# Altium PCB Exp 10.PcbDoc
Units mm, origin at the board's own origin, x right, y up, seen from the top; angles counter-clockwise.
Board outline 152.4 x 136.53 mm, 2 copper layers (Top Layer, Bottom Layer); 66 components, 92 nets, 213 pads, 0 vias.
Unrouted connection lines stored in the file: 6.
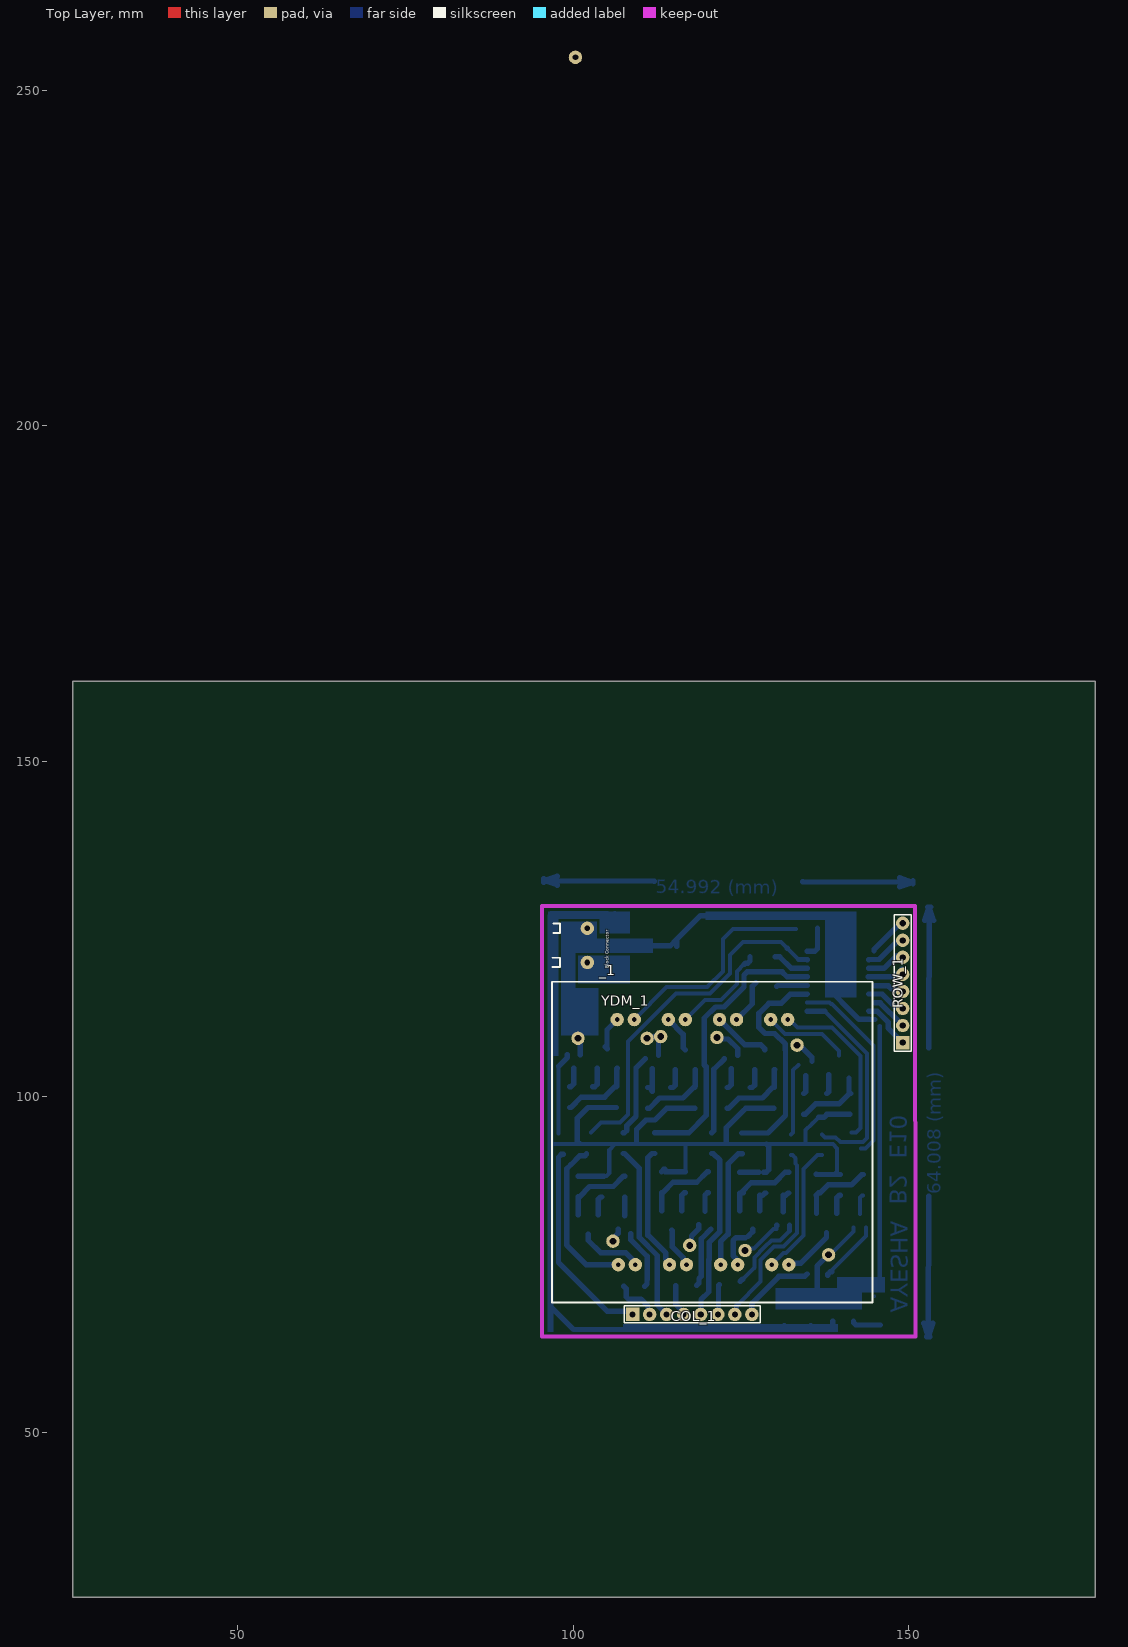
[diagram p0: Top Layer view]
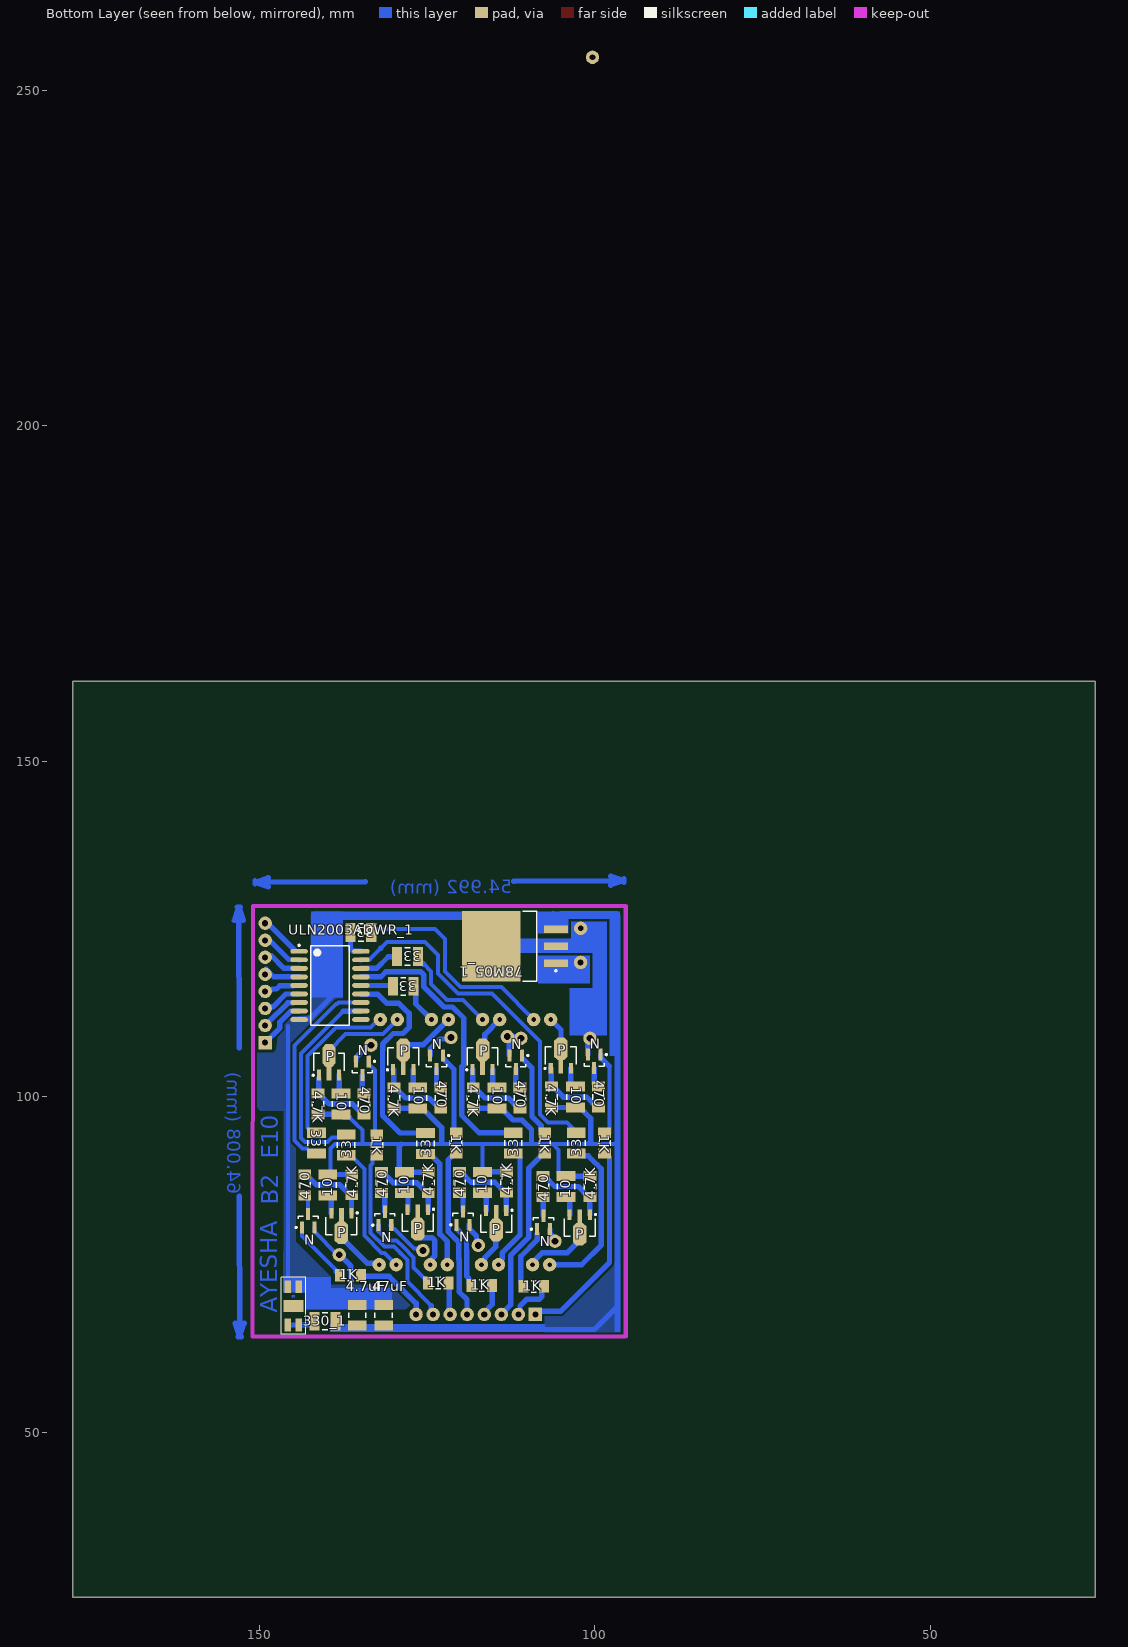
[diagram p1: Bottom Layer view, seen from below]

## Layer stack, top to bottom
Top Solder: solder mask 0.0102, Solder Resist, Dk 3.5
Top Layer: signal copper 0.0356
Dielectric 1: dielectric 0.32, FR-4, Dk 4.8
Bottom Layer: signal copper 0.0356
Bottom Solder: solder mask 0.0102, Solder Resist, Dk 3.5

## Board outline
25.4,25.4 177.8,25.4 177.8,161.925 25.4,161.925

## Design rules (kind name [scope] priority, off if disabled: settings)
Clearance [All] p1: gap=0.35 ignorepadtopadclearanceinfootprint=FALSE
PlaneClearance [All] p1: clearance=0.85
PolygonConnect [All] p1: connectstyle=Direct reliefconductorwidth=0.254 reliefentries=4 polygonreliefangle="90 Angle" airgapwidth=0.254
RoutingVias [All] p1: holewidth=0.711 width=1.27 viastyle="Through Hole" minholewidth=0.711 minwidth=1.27 maxholewidth=0.711 maxwidth=1.27
SolderMaskExpansion [All] p1: expansion=0.102 istentingtop=FALSE
Width [All] p1: maxlimit=0.8 minlimit=0.6 preferedwidth=0.6 minimp=50.000000 maximp=50.000000 favimp=50.000000
29 further rules are at their usual default settings.

## Components (designator, comment, footprint, x,y, rotation, side; value= is the part's Value field where it differs from the comment)
1K "Comment" RESC3216M 132.461,92.837 r270 bottom
1K "Comment" RESC3216M 98.552,93.091 r270 bottom
1K "Comment" RESC3216M 120.65,93.091 r270 bottom
1K "Comment" RESC3216M 107.442,93.091 r270 bottom
1K "Comment" RESC3216M 123.317,72.263 r180 bottom
1K "Comment" RESC3216M 116.84,71.882 r180 bottom
1K "Comment" RESC3216M 136.398,73.406 r180 bottom
1K "Comment" RESC3216M 109.093,71.755 r180 bottom
4.7K "Comment" RESC3216M 141.224,98.933 r270 bottom
4.7K "Comment" RESC3216M 106.426,99.949 r270 bottom
4.7K "Comment" RESC3216M 129.921,99.822 r270 bottom
4.7K "Comment" RESC3216M 118.11,99.822 r270 bottom
4.7K "Comment" RESC3216M 124.792,87.226 r90 bottom
4.7K "Comment" RESC3216M 113.157,87.275 r90 bottom
4.7K "Comment" RESC3216M 136.222,86.883 r90 bottom
4.7K "Comment" RESC3216M 100.711,86.64 r90 bottom
4.7uF "Comment" CAPC3225M 135.382,67.437 r90 bottom
10 "Comment" RESC3225M 137.795,98.933 r270 bottom
10 "Comment" RESC3225M 102.87,99.949 r270 bottom
10 "Comment" RESC3225M 126.365,99.822 r270 bottom
10 "Comment" RESC3225M 114.554,99.822 r270 bottom
10 "Comment" RESC3225M 128.348,87.2 r90 bottom
10 "Comment" RESC3225M 116.713,87.249 r90 bottom
10 "Comment" RESC3225M 139.778,86.857 r90 bottom
10 "Comment" RESC3225M 104.267,86.614 r90 bottom
33 "Comment" RESC3225M 134.848,124.46 r0 bottom
33 "Comment" RESC3225M 102.743,93.091 r90 bottom
33 "Comment" RESC3225M 112.141,93.091 r90 bottom
33 "Comment" RESC3225M 127.889,120.904 r0 bottom
33 "Comment" RESC3225M 125.217,93.041 r90 bottom
33 "Comment" RESC3225M 128.524,116.459 r0 bottom
33 "Comment" RESC3225M 137.033,92.837 r90 bottom
33 "Comment" RESC3225M 141.478,93.091 r270 bottom
47uF "Comment" CAPC3225M 131.445,67.437 r90 bottom
78M05_1 "Comment" TO254P1420-4M 111.891,122.428 r0 bottom
330_1 "Comment" RESC3225M 140.208,66.548 r180 bottom
470 "Comment" RESC3216M 134.366,98.933 r270 bottom
470 "Comment" RESC3216M 99.441,99.949 r270 bottom
470 "Comment" RESC3216M 122.936,99.822 r270 bottom
470 "Comment" RESC3216M 111.125,99.822 r270 bottom
470 "Comment" RESC3216M 131.777,87.2 r90 bottom
470 "Comment" RESC3216M 120.142,87.249 r90 bottom
470 "Comment" RESC3216M 143.207,86.857 r90 bottom
470 "Comment" RESC3216M 107.696,86.614 r90 bottom
_1 "Comment" "PCB Block Connector" 101.854,122.555 r90 top
COL_1 "Comment" HDR1X8 108.839,67.564 r0 top
N "Comment" SOT23-3M 134.62,104.267 r270 bottom
N "Comment" SOT23-3M 100.076,105.283 r270 bottom
N "Comment" SOT23-3M 123.571,105.156 r270 bottom
N "Comment" SOT23-3M 111.76,105.156 r270 bottom
N "Comment" SOT23-3M 131.269,81.866 r90 bottom
N "Comment" SOT23-3M 119.634,81.915 r90 bottom
N "Comment" SOT23-3M 142.699,81.523 r90 bottom
N "Comment" SOT23-3M 107.635,81.264 r90 bottom
P "Comment" SOT89M 139.597,105.151 r90 bottom
P "Comment" SOT89M 105.053,106.167 r90 bottom
P "Comment" SOT89M 128.524,105.967 r90 bottom
P "Comment" SOT89M 116.713,105.967 r90 bottom
P "Comment" SOT89M 126.365,81.28 r270 bottom
P "Comment" SOT89M 114.681,81.137 r270 bottom
P "Comment" SOT89M 137.746,80.745 r270 bottom
P "Comment" SOT89M 102.235,80.502 r270 bottom
ROW_1 "Comment" HDR1X8 149.098,108.077 r90 top
ULN2003ADWR_1 "Comment" SOIC127P1030-18M 139.446,116.586 r180 bottom
YDM_1 "Comment" "Yellow or Green Dot Matrix DIsplay" 120.607,93.244 r0 top net-tie
? "Comment" SMD-LED 144.907,68.834 r90 bottom

## Footprints (in the part's own frame and the unit in brackets; to place one, negate y for a bottom-side part, rotate by r counter-clockwise, add the part's x,y. Pads: shape width x height; smd on the part's side, far side on the other; paste and mask are expansions set on the pad)
CAPC3225M [mm] "Chip Capacitor, Body 3.2x2.5mm, IPC Low Density"
  rect 1.5x2.8 smd: 1(-1.55,0) 2(1.55,0)
  silkscreen extent -0.4,-1.3 0.4,1.3, body extent -1.7,-1.35 1.7,1.35, height 1.35
HDR1X8 [mm] "Connector; Header; 8 Position"
  rect 2x2 hole 0.9: 1(0,0)
  round 2 hole 0.9: 2(2.54,0) 3(5.08,0) 4(7.62,0) 5(10.16,0) 6(12.7,0) 7(15.24,0) 8(17.78,0)
  silkscreen extent -1.27,-1.27 19.05,1.27
"PCB Block Connector" [mm]
  round 2 hole 0.85: 1(-2.54,-0.254) 2(2.54,-0.24)
  silkscreen extent -3.22,3.82 3.25,4.96, body extent -5,-5.45 5.03,4.96, height 5.08
RESC3216M [mm] "Chip Resistor, Body 3.2x1.6mm, IPC Low Density"
  rect 1.5x1.9 smd: 1(-1.55,0) 2(1.55,0)
  silkscreen extent -0.4,-0.85 0.4,0.85, body extent -1.68,-0.87 1.68,0.87, height 0.71
RESC3225M [mm] "Chip Resistor, Body 3.2x2.5mm, IPC Low Density"
  rect 1.5x2.8 smd: 1(-1.55,0) 2(1.55,0)
  silkscreen extent -0.4,-1.3 0.4,1.3, body extent -1.68,-1.32 1.68,1.32, height 0.71
SMD-LED [mm] "SMD LED PCB"
  rect 1.9x1 smd: 1(-2.85,0.82) 2(-2.85,-0.82) 3(2.85,-0.82) 4(2.85,0.82)
  rect 1.8x3 smd: 5(0,0)
  Top Layer circle w0.154: c1.441,-0.01 r0.149
  silkscreen extent -4.25,-1.84 4.25,1.82
SOIC127P1030-18M [mm] "SOIC, 18-Leads, Body 11.6x7.5mm, Pitch 1.27mm, IPC Low Density"
  oval 2.6x0.7 smd: 1(-4.6,5.08) 2(-4.6,3.81) 3(-4.6,2.54) 4(-4.6,1.27) 5(-4.6,0) 6(-4.6,-1.27) 7(-4.6,-2.54) 8(-4.6,-3.81) 9(-4.6,-5.08) 10(4.6,-5.08) 11(4.6,-3.81) 12(4.6,-2.54) 13(4.6,-1.27) 14(4.6,0) 15(4.6,1.27) 16(4.6,2.54) 17(4.6,3.81) 18(4.6,5.08)
  silkscreen extent -4.72,-5.9 2.9,6.1, body extent -3.8,-5.95 3.8,5.95, height 2.65
SOT23-3M [mm] "SOT23, 3-Leads, Body 2.9x1.3mm, Pitch 0.95mm, Lead Span 2.5mm, IPC Low Density"
  rect 1.8x0.6 smd: b(-1,0.95) c(1,0) e(-1,-0.95)
  silkscreen extent -1.12,-1.5 0.7,1.92, body extent -0.7,-1.5 0.7,1.5, height 1.1
SOT89M [mm] "SOT89, 3-Leads, Body 4.5x2.4 mm, Pitch 1.5mm, Lead Span 4.1mm, IPC Low Density"
  rect 1.6x0.6 smd: b(-1.9,1.5) e(-1.9,-1.5)
  rect 2x0.7 smd: c(-1.7,0)
  oct 3.4x2 smd: c(1,0)
  silkscreen extent -2.07,-2.3 1.3,2.48, body extent -1.3,-2.3 1.3,2.3, height 1.6
TO254P1420-4M [mm] "D2-PAK, 4-Leads, Body 8.9x10.1mm, Pitch 2.54mm, Lead Span 14.2mm, IPC Low Density"
  rect 8.7x10.55 smd: C(3.55,0)
  rect 3.6x1.1 smd: GND(-6.1,0) input(-6.1,2.54) OUT(-6.1,-2.54)
  silkscreen extent -6.22,-5.2 -1.2,5.2, body extent -3.25,-5.2 6.15,5.2, height 4.65
"Yellow or Green Dot Matrix DIsplay" [mm] "Y or G Dot Matrix"
  round 2 hole 0.7: 3(-13.886,-18.262) 4(-11.346,-18.262) 6(-6.266,-18.262) 7(-3.726,-18.262) 9(1.354,-18.262) 10(3.894,-18.262) 12(8.974,-18.262) 13(11.514,-18.262) 20(11.346,18.262) 21(8.806,18.262) 23(3.726,18.262) 24(1.186,18.262) 26(-3.894,18.262) 27(-6.434,18.262) 29(-11.514,18.262) 30(-14.054,18.262)
  silkscreen extent -23.78,-23.9 23.99,23.89

## Free pads (board coordinates)
  round 2 hole 0.85: 2(100.33,254.889)
  round 2 hole 1: 3(138.049,76.454) 4(133.35,107.696) 5(121.412,108.839) 6(113.03,108.966) 7(100.711,108.712) 8(105.918,78.486) 9(117.348,77.851) 10(125.603,77.089) 11(110.998,108.712)

## Nets (pads, with @x,y where several pads share a name; then routed paths per layer and width w, separated by ;. In a path a pad name is that pad's centre, name@x,y a point inside that pad or via, vN(x,y) a via of type N, cw(c..) or ccw(c..) an arc to the next point about the centre after c; other vN are vias at no path point)
1: 33.1@102.743,91.541 YDM_1.3 | length 24.3
  Bottom Layer w0.8: 33.1@101.981,91.541 101.981,91.429 101.743,91.191 100.963,91.191 99.636,89.864 99.625,89.864 99.009,89.249 99.009,77.902 101.929,74.982 YDM_1.3
2: P.c@102.235,79.502 P.c@102.235,82.202 YDM_1.4 | length 9.2
  Bottom Layer w0.8: P.c@102.235,79.502 102.235,78.613 104.112,76.736 107.831,76.736 YDM_1.4@109.204,75.363
3: 33.1@112.141,91.541 YDM_1.6 | length 18.5
  Bottom Layer w0.8: 33.1@112.141,91.541 111.745,91.541 111.125,90.921 111.125,79.375 113.792,76.708 113.792,75.855 114.34,75.307 YDM_1.6
4: P.c@114.681,80.137 P.c@114.681,82.837 YDM_1.7 | length 6.1
  Bottom Layer w0.8: P.c@114.681,80.137 114.742,80.076 114.742,77.663 116.408,75.997 116.408,75.833 116.88,75.361 YDM_1.7
5: 33.1@125.217,91.491 YDM_1.9 | length 18.2
  Bottom Layer w0.8: YDM_1.9 121.96,78.401 123.085,79.526 123.085,90.01 124.567,91.491 33.1@125.217,91.491
6: P.c@126.365,80.28 P.c@126.365,82.98 YDM_1.10 | length 7.2
  Bottom Layer w0.8: YDM_1.10 124.232,75.25 124.232,75.88 123.825,76.287 123.825,78.583 124.254,79.012 P.c@125.616,79.012 ; P.c@126.046,79.204 126.746,79.904 P.c@126.746,80.28
7: 33.1@137.033,91.287 YDM_1.12 | length 20
  Bottom Layer w0.6: YDM_1.12 131.311,76.713 131.738,76.713 134.327,79.302 134.327,89.231 136.383,91.287 33.1@137.033,91.287
8: P.c@137.746,79.745 P.c@137.746,82.445 YDM_1.13 | length 8
  Bottom Layer w0.8: YDM_1.13 132.35,75.212 133.913,75.212 137.746,79.045 P.c@137.746,79.745
9: 33.1@141.478,94.641 YDM_1.20 | length 25.5
  Bottom Layer w0.6: YDM_1.20@132.22,111.506 133.43,110.296 138.571,110.296 142.824,106.043 142.824,95.337 142.128,94.641 33.1@141.478,94.641
  Bottom Layer w0.8: YDM_1.20 YDM_1.20@132.22,111.506
10: P.c@139.597,103.451 P.c@139.597,106.151 YDM_1.21 | length 12.8
  Bottom Layer w0.6: YDM_1.21 131.573,109.346 137.102,109.346 139.597,106.851 P.c@139.597,106.151
11: 33.1@126.974,116.459 YDM_1.23 | length 6.7
  Bottom Layer w0.8: YDM_1.23 126.686,113.859 126.686,116.469 33.1@127.228,117.011
12: P.c@128.524,104.267 P.c@128.524,106.967 YDM_1.24 | length 8.7
  Bottom Layer w0.8: YDM_1.24 125.532,107.767 127.924,107.767 128.524,107.167 P.c@128.524,106.967
13: 33.1@126.339,120.904 YDM_1.26 | length 15
  Bottom Layer w0.6: YDM_1.26 119.634,114.427 122.047,114.427 124.401,116.781 124.401,118.686 125.474,119.759
  Bottom Layer w0.8: 125.474,119.759 125.52,119.759 125.665,119.904 125.989,119.904 126.339,120.254 33.1@126.339,120.904
14: P.c@116.713,104.267 P.c@116.713,106.967 YDM_1.27 | length 5.6
  Bottom Layer w0.8: YDM_1.27 116.379,109.3 116.379,107.301 P.c@116.713,106.967
15: 33.1@133.298,124.46 YDM_1.29 | length 32.5
  Bottom Layer w0.6: YDM_1.29 113.914,116.327 119.967,116.327 122.301,118.661 122.301,123.474 123.795,124.968 33.1@133.223,124.968
16: P.c@105.053,104.467 P.c@105.053,107.167 YDM_1.30 | length 5.1
  Bottom Layer w0.8: P.c@104.775,107.445 P.c@105.053,107.167 ; P.c@105.029,107.445 105.029,109.982 YDM_1.30
_1: 33.2@102.743,94.641 ULN2003ADWR_1.17 | length 53
  Bottom Layer w0.6: 33.2@102.631,94.641 104.155,96.165 106.952,96.165 108.17,97.382 108.17,108.217 115.33,115.377 120.361,115.377 123.351,118.367 123.351,121.127 125.278,123.054 130.952,123.054 131.891,122.115 ULN2003ADWR_1.17@133.56,120.446
  Bottom Layer w0.8: ULN2003ADWR_1.17@133.56,120.446 134.796,120.446 ULN2003ADWR_1.17
_3: 33.2@112.141,94.641 ULN2003ADWR_1.15 | length 42.9
  Bottom Layer w0.8: 33.2@112.141,94.641 117.24,94.641 119.81,97.211 119.81,104.457 119.507,104.76 119.507,111.695 121.189,113.377 122.482,113.377 125.451,116.346 125.451,118.147 125.913,118.609 131.135,118.609 131.888,117.856 ULN2003ADWR_1.15
_5: 33.2@125.217,94.591 ULN2003ADWR_1.13 | length 33.7
  Bottom Layer w0.8: 33.2@125.093,94.591 129.001,94.591 131.621,97.211 131.621,106.95 131.6,106.971 131.6,107.834 130.017,109.417 128.581,109.417 127.663,110.335 127.663,112.423 129.159,113.919 130.975,113.919 132.346,115.29 134.82,115.29 ULN2003ADWR_1.13
_7: 33.2@137.033,94.387 ULN2003ADWR_1.11 | length 31.6
  Bottom Layer w0.6: 33.2@137.033,94.387 137.483,93.937 139.113,93.937 139.809,93.241 143.147,93.241 143.774,93.868 143.774,106.437 137.764,112.447 137.46,112.751
  Bottom Layer w0.8: ULN2003ADWR_1.11 134.871,112.751 137.46,112.751
_9: 33.2@141.478,91.541 ULN2003ADWR_1.12 | length 29
  Bottom Layer w0.6: ULN2003ADWR_1.12 138.176,114.046 138.43,113.792 138.557,113.792 144.724,107.625 144.724,93.474 143.541,92.291 142.875,92.291
_11: 33.2@130.074,116.459 ULN2003ADWR_1.14 | length 4.6
  Bottom Layer w0.8: 33.2@130.328,116.459 130.455,116.586 ULN2003ADWR_1.14
_13: 33.2@129.439,120.904 ULN2003ADWR_1.16 | length 5.5
  Bottom Layer w0.8: 33.2@130.074,120.86 130.764,120.86 132.498,119.126 ULN2003ADWR_1.16
_15: 33.2@136.398,124.46 ULN2003ADWR_1.18 | length 4.8
  Bottom Layer w0.8: ULN2003ADWR_1.18 134.865,121.685 136.016,121.685 136.398,122.067 33.2@136.398,125.105
D1: ROW_1.7 ULN2003ADWR_1.2 | length 5.3
  Bottom Layer w0.8: ULN2003ADWR_1.2 144.096,120.446 145.592,120.446 ROW_1.7@148.202,123.056
D2: 1K.2@107.543,71.755 COL_1.2 | length 6.9
  Bottom Layer w0.8: 1K.2@107.543,71.755 107.893,71.405 107.893,70.201 108.244,69.85 110.103,69.85 111.14,68.812 111.14,67.803 COL_1.2
D3: ROW_1.5 ULN2003ADWR_1.4 | length 5.5
  Bottom Layer w0.8: ULN2003ADWR_1.4@143.919,117.856 147.828,117.856 ROW_1.5@148.971,118.999
D4: 1K.2@115.29,71.882 COL_1.4 | length 4.8
  Bottom Layer w0.8: 1K.2@115.29,71.882 115.29,69.058 116.459,67.889 COL_1.4
D5: ROW_1.3 ULN2003ADWR_1.6 | length 5.9
  Bottom Layer w0.8: ULN2003ADWR_1.6 146.038,115.316 147.967,113.387 148.868,113.387 ROW_1.3
D6: 1K.2@121.767,72.263 COL_1.6 | length 4.5
  Bottom Layer w0.8: COL_1.6 121.653,67.678 121.653,71.895 1K.2@121.767,72.009
D7: ROW_1.1 ULN2003ADWR_1.8 | length 7.5
  Bottom Layer w0.8: ULN2003ADWR_1.8 144.096,112.726 145.332,112.726 146.915,111.143 146.915,110.26 ROW_1.1
D8: 1K.2@134.848,73.406 COL_1.8 | length 11.7
  Bottom Layer w0.8: COL_1.8 126.619,69.215 130.636,73.232 134.498,73.232 1K.2@134.848,73.582
D9: ROW_1.2 ULN2003ADWR_1.7 | length 5.3
  Bottom Layer w0.8: ULN2003ADWR_1.7@144.946,113.996 145.732,113.996 148.844,110.884 ROW_1.2@148.844,110.744
D10: 1K.2@132.461,91.287 COL_1.7 | length 28.9
  Bottom Layer w0.6: 124.333,68.856 127.93,72.453 127.93,75.665 128.897,76.632 128.903,76.632 129.934,77.663 131.345,77.663 133.377,79.695 133.377,89.769 133.111,90.035 133.111,90.837 132.661,91.287 1K.2@132.461,91.287
  Bottom Layer w0.8: COL_1.7 124.333,67.818 124.333,68.856
D11: ROW_1.4 ULN2003ADWR_1.5 | length 4.3
  Bottom Layer w0.8: ULN2003ADWR_1.5@144.946,116.536 146.935,116.536 147.418,116.054 148.029,116.054 148.156,115.927 148.789,115.927 ROW_1.4@148.916,116.054
D12: 1K.2@120.65,91.541 COL_1.5 | length 25.8
  Bottom Layer w0.8: COL_1.5 119.033,67.598 119.033,69.764 120.21,70.941 120.21,75.707 120.248,75.745 120.248,78.315 121.842,79.909 121.842,90.549 120.85,91.541 1K.2@120.65,91.541
D13: ROW_1.6 ULN2003ADWR_1.3 | length 4.9
  Bottom Layer w0.8: ULN2003ADWR_1.3 146.304,119.126 ROW_1.6@148.203,121.025
D14: 1K.2@107.442,91.541 COL_1.3 | length 26.8
  Bottom Layer w0.8: 1K.2@107.442,91.541 107.642,91.541 109.855,89.328 109.855,79.019 112.522,76.352 112.522,68.961 COL_1.3
D15: ROW_1.8 ULN2003ADWR_1.1 | length 5.9
  Bottom Layer w0.8: ULN2003ADWR_1.1@144.819,121.716 144.819,121.959 ROW_1.8@148.844,125.984
D16: 1K.2@98.552,91.541 COL_1.1 | length 30.9
  Bottom Layer w0.8: 1K.2@98.552,91.414 98.225,91.414 97.797,90.986 97.797,75.304 105.085,68.016 108.387,68.016 COL_1.1
GND: 4.7uF.2 47uF.2 78M05_1.C 78M05_1.GND ?.3 ?.4 _1.2 N.e pad.3 pad.4 pad.5 pad.6 pad.7 pad.8 pad.9 pad.10 pad.11 ULN2003ADWR_1.9 | length 180.6
  Bottom Layer w0.6: pad.10 125.871,77.357 126.915,77.357 129.824,80.266 130.319,80.266 N.e@130.319,80.761 ; pad.3 138.293,76.454 141.761,79.922 141.761,80.511 N.e@141.749,80.523 ; 142.875,72.009 144.831,72.009 145.674,72.852 145.674,110.547
  Bottom Layer w0.8: N.e@101.026,106.283 101.026,109.413 100.711,109.728 99.792,109.728 99.441,110.079 99.441,122.442 _1.2 102.094,124.093 78M05_1.GND@104.086,122.101 ; 78M05_1.GND@105.006,122.358 105.231,122.133 78M05_1.GND@106.116,122.133 ; pad.8 106.186,78.754 106.186,79.165 106.685,79.664 N.e@106.685,80.264 ; 78M05_1.GND@107.569,122.492 114.452,122.492 78M05_1.C@115.31,123.35 ; N.e@112.71,106.156 112.71,109.163 pad.11 pad.6 ; 78M05_1.C 115.441,123.219 78M05_1.C@115.31,123.35 ; pad.9 117.616,77.865 117.616,79.247 118.684,80.315 N.e@118.684,80.915 ; pad.5 121.642,108.609 123.063,108.609 124.521,107.152 N.e@124.521,106.156 ; N.e@130.319,80.761 N.e@130.319,80.866 ; pad.4 133.618,107.428 134.009,107.428 135.57,105.867 N.e@135.57,105.267 ; pad.3@138.317,76.722 136.348,74.753 136.348,69.953 4.7uF.2 ; 139.891,121.221 137.922,119.253 ; ULN2003ADWR_1.9 ULN2003ADWR_1.9@144.925,111.506 ; ULN2003ADWR_1.9@144.046,111.525 142.602,111.525 141.986,112.141 137.922,116.205 137.922,119.253 ; 78M05_1.C@115.31,123.35 118.96,127 137.92,127 137.922,126.998 137.922,119.253 ; 4.7uF.2 4.7uF.2@136.032,68.987 ; 4.7uF.2 4.7uF.2@136.032,68.987 ; 4.7uF.2@136.032,68.987 4.7uF.2@136.382,69.337 ; 4.7uF.2@136.032,68.987 136.382,68.987 139.161,68.987 141.858,71.684 142.875,71.684 ?.3 ; 4.7uF.2@136.032,68.987 4.7uF.2@136.382,69.337 ; 4.7uF.2@136.382,69.337 4.7uF.2@136.382,69.707 ; 4.7uF.2@136.382,69.337 4.7uF.2@136.382,69.707 ; 4.7uF.2@136.382,69.707 136.588,69.913 4.7uF.2@136.382,69.707 ; ?.3 143.762,72.009 142.875,72.009 143.2,71.684 ?.3
Input: 78M05_1.input _1.1 | length 3.6
  Bottom Layer w0.8: _1.1@103.028,120.272 103.352,120.272 103.964,119.66 106.176,119.66 78M05_1.input@106.326,119.51
LED_R: 330_1.1 ?.1 ?.2 | length 4.3
  Bottom Layer w0.8: 330_1.1 141.758,66.334 142.108,65.984 ?.2 ?.1
N2b: 1K.1@110.643,71.755 N.b@108.585,80.264 | length 9
  Bottom Layer w0.8: N.b@108.546,79.59 108.546,78.701 111.01,76.237 111.01,72.774 110.993,72.757 110.993,72.105 1K.1@110.643,71.755
N2c: 470.1@107.696,85.064 N.c@107.635,82.264 | length 2.8
  Bottom Layer w0.8: N.c@107.635,82.264 107.696,82.325 470.1@107.696,85.064
N2e: 
N4b: 1K.1@118.39,71.882 N.b@120.584,80.915 | length 9.3
  Bottom Layer w0.8: 1K.1@118.39,71.882 118.74,72.232 118.74,72.896 119.06,73.216 119.06,77.088 119.098,77.126 119.098,78.839 N.b@120.522,80.263
N4c: 470.1@120.142,85.699 N.c@119.634,82.915 | length 3.1
  Bottom Layer w0.8: N.c@119.634,82.915 119.634,85.349 119.984,85.699 470.1@120.142,85.699
N4e: 
N6b: 1K.1@124.867,72.263 N.b@132.219,80.866 | length 12.3
  Bottom Layer w0.6: 1K.1@125.271,72.813 125.271,72.867 125.317,72.913 125.371,72.913 126.98,74.522 126.98,76.059 128.503,77.582 128.509,77.582 129.54,78.613 130.81,78.613 N.b@132.219,80.022
  Bottom Layer w0.8: 1K.1@124.867,72.463 125.217,72.813 1K.1@125.271,72.813 ; N.b@132.219,80.022 N.b@132.219,80.866
N6c: 470.1@131.777,85.65 N.c@131.269,82.866 | length 3.1
  Bottom Layer w0.8: N.c@131.269,82.866 470.1@131.269,85.3 ; 470.1@131.65,85.3 132,85.65 470.1@132.158,85.65
N6e: 
N8b: 1K.1@137.948,73.406 N.b@143.649,80.523 | length 9.6
  Bottom Layer w0.6: 1K.1@138.557,73.914 138.557,74.173 143.649,79.265 N.b@143.649,80.523
  Bottom Layer w0.8: 1K.1@137.948,73.406 137.948,73.564 138.298,73.914 1K.1@138.557,73.914
N8c: 470.1@143.207,85.307 N.c@142.699,82.523 | length 3.1
  Bottom Layer w0.6: N.c@142.699,82.523 142.711,82.535 142.711,84.956 143.061,85.306 470.1@143.207,85.306
N8e: 
N10b: 1K.1@132.461,94.387 N.b@133.67,105.267 | length 10.8
  Bottom Layer w0.6: 1K.1@132.461,94.387 132.766,94.692 132.766,103.963 N.b@133.57,104.767
N10c: 470.1@134.366,100.483 N.c@134.62,103.267 | length 2.8
  Bottom Layer w0.8: 470.1@134.366,100.483 134.62,100.737 N.c@134.62,103.146
N10e: 
N12b: 1K.1@120.65,94.641 N.b@122.621,106.156 | length 11.8
  Bottom Layer w0.8: 1K.1@120.65,94.641 120.96,94.951 120.96,104.095 N.b@122.521,105.656
N12c: 470.1@122.936,101.372 N.c@123.571,104.156 | length 3.2
  Bottom Layer w0.8: 470.1@122.936,101.372 123.136,101.372 123.571,101.807 N.c@123.571,104.156
N12e: 
N14b: 1K.1@107.442,94.641 N.b@110.81,106.156 | length 12.5
  Bottom Layer w0.8: 1K.1@107.442,94.641 107.642,94.641 107.992,94.991 107.992,95.719 109.351,97.078 109.351,104.297 N.b@110.71,105.656
N14c: 470.1@111.125,101.372 N.c@111.76,104.156 | length 4.1
  Bottom Layer w0.8: 470.1@111.125,101.372 111.325,101.372 470.1@111.76,100.937 ; 470.1@111.76,100.838 470.1@111.76,100.937 ; N.c@111.76,104.156 470.1@111.76,100.937
N14e: 
N16b: 1K.1@98.552,94.641 N.b@99.126,106.283 | length 12.3
  Bottom Layer w0.6: 1K.1@97.805,94.532 97.805,104.536
  Bottom Layer w0.8: 97.805,104.536 99.126,105.857 N.b@99.126,106.283
N16c: 470.1@99.441,101.499 N.c@100.076,104.283 | length 3.2
  Bottom Layer w0.8: 470.1@99.441,101.499 99.641,101.499 100.076,101.934 N.c@100.076,104.283
N16e: 
P2b: 4.7K.1@100.711,85.09 470.2@107.696,88.164 P.b@100.735,82.402 | length 11
  Bottom Layer w0.8: P.b@100.735,82.402 100.723,82.414 100.723,85.078 100.711,85.09 100.911,85.09 102.448,86.627 105.959,86.627 107.496,88.164 470.2@107.696,88.164
P2c: 
P2e: 10.1@104.267,85.064 P.e@103.735,82.402 | length 3
  Bottom Layer w0.8: P.e@103.735,82.402 103.735,84.714 104.085,85.064 10.1@104.267,85.064
P4b: 4.7K.1@113.157,85.725 470.2@120.142,88.799 P.b@113.181,83.037 | length 10.8
  Bottom Layer w0.8: 4.7K.1@113.157,85.725 113.181,85.701 P.b@113.181,83.037 ; 4.7K.1@113.357,85.725 114.894,87.262 118.405,87.262 119.942,88.799 470.2@120.142,88.799
P4c: 
P4e: 10.1@116.713,85.699 P.e@116.181,83.037 | length 3
  Bottom Layer w0.8: P.e@116.181,83.037 116.181,85.349 116.531,85.699 10.1@116.713,85.699
P6b: 4.7K.1@124.792,85.676 470.2@131.777,88.75 P.b@124.865,83.18 | length 10.9
  Bottom Layer w0.8: P.b@124.804,83 4.7K.1@124.804,85.664 ; 4.7K.1@124.98,85.664 126.529,87.213 130.04,87.213 470.2@131.577,88.75 ; 4.7K.1@125.185,85.664 4.7K.1@125.361,85.664 ; 470.2@131.958,88.75 470.2@132.158,88.75
P6c: 
P6e: 10.1@128.348,85.65 P.e@127.865,83.18 | length 3
  Bottom Layer w0.8: P.e@127.816,82.988 10.1@127.816,85.3 ; 10.1@128.197,85.3 128.547,85.65 10.1@128.729,85.65
P8b: 4.7K.1@136.222,85.333 470.2@143.207,88.407 P.b@136.246,82.645 | length 11
  Bottom Layer w0.8: P.b@136.246,82.645 136.246,85.32 136.222,85.333 136.572,85.683 136.784,85.683 137.97,86.868 141.468,86.868 143.007,88.407 470.2@143.207,88.407
P8c: 
P8e: 10.1@139.778,85.307 P.e@139.246,82.645 | length 3
  Bottom Layer w0.8: P.e@139.246,82.645 139.258,82.657 139.258,84.956 139.676,85.306 10.1@139.778,85.306
P10b: 4.7K.1@141.224,100.483 470.2@134.366,97.383 P.b@141.097,103.251 | length 10.6
  Bottom Layer w0.8: 470.2@134.366,97.383 134.566,97.383 136.116,98.933 139.601,98.933 141.151,100.483 141.351,100.483 141.097,100.737 P.b@141.097,102.751
P10c: 
P10e: 10.1@137.795,100.483 P.e@138.097,103.251 | length 2.9
  Bottom Layer w0.8: 10.1@137.795,100.483 138.049,100.737 138.049,102.703 138.097,102.751 P.e@138.097,103.3
P12b: 4.7K.1@129.921,101.372 470.2@122.936,98.272 P.b@130.024,104.067 | length 11
  Bottom Layer w0.8: 470.2@122.936,98.272 123.136,98.272 124.686,99.822 128.171,99.822 129.721,101.372 129.921,101.372 129.972,101.423 129.972,104.015 P.b@130.024,104.067
P12c: 
P12e: 10.1@126.365,101.372 P.e@127.024,104.067 | length 3.1
  Bottom Layer w0.8: 10.1@126.365,101.372 126.674,101.372 127.024,101.722 P.e@127.024,104.067
P14b: 4.7K.1@118.11,101.372 470.2@111.125,98.272 P.b@118.213,104.067 | length 10.7
  Bottom Layer w0.8: 470.2@111.125,98.272 111.325,98.272 112.875,99.822 116.36,99.822 117.91,101.372 4.7K.1@118.11,101.372 ; 4.7K.1@118.161,101.627 118.161,104.015 P.b@118.213,104.067
P14c: 
P14e: 10.1@114.554,101.372 P.e@115.213,104.067 | length 3.1
  Bottom Layer w0.8: 10.1@114.554,101.372 114.863,101.372 115.213,101.722 P.e@115.213,104.067
P16b: 4.7K.1@106.426,101.499 470.2@99.441,98.399 P.b@106.553,104.267 | length 11.1
  Bottom Layer w0.8: 470.2@99.441,98.399 99.641,98.399 101.191,99.949 104.676,99.949 106.226,101.499 106.426,101.499 106.489,101.562 106.489,104.203 P.b@106.553,104.267
P16c: 
P16e: 10.1@102.87,101.499 P.e@103.553,104.267 | length 3.2
  Bottom Layer w0.8: 10.1@102.87,101.499 103.203,101.499 103.553,101.849 P.e@103.553,104.267
VCC: 4.7K.2 4.7uF.1 10.2 47uF.1 78M05_1.OUT 330_1.2 | length 219.2
  Bottom Layer w0.6: 96.647,93.218 96.647,93.022 96.728,92.941 100.926,92.941 106.223,92.941 ; 96.647,96.012 96.647,116.176 96.566,116.257 96.454,116.257 97.028,116.84 ; 10.2@104.267,88.164 104.508,88.164 104.521,88.177 104.93,88.177 105.367,88.614 105.367,92.085 106.223,92.941 ; 10.2@116.713,88.799 116.713,92.687 ; 10.2@136.557,96.933 135.601,95.977 135.553,95.977 134.617,95.04 134.617,92.941 ; 10.2@139.135,88.683 139.337,88.885 139.337,92.306 138.702,92.941 134.617,92.941 ; 106.223,92.941 109.424,92.941 116.713,92.941 122.809,92.941 128.79,92.941 129.109,92.941 134.617,92.941
  Bottom Layer w0.8: 96.554,93.218 96.554,68.8 100.042,65.312 123.444,65.312 123.444,65.542 131.1,65.542 47uF.1 ; 96.647,93.218 96.647,96.012 ; 96.705,127.254 105.05,127.254 105.275,127.03 ; 4.7K.2@100.711,88.19 100.724,88.177 10.2@104.521,88.177 ; 100.926,93.041 100.593,93.374 100.593,96.772 102.22,98.399 102.87,98.399 4.7K.2@106.426,98.399 ; 106.194,127.287 106.194,125.472 106.444,125.222 78M05_1.OUT@107.293,125.222 ; 109.424,93.141 109.424,95.135 110.818,96.528 112.16,96.528 113.904,98.272 4.7K.2@118.11,98.272 ; 4.7K.2@113.157,88.825 113.411,89.079 113.507,89.175 4.7K.2@113.678,89.175 ; 4.7K.2@113.678,88.812 10.2@116.7,88.812 ; 122.809,93.062 122.809,95.394 123.506,96.091 123.534,96.091 125.365,97.922 125.715,98.272 126.365,98.272 4.7K.2@129.921,98.272 ; 4.7K.2@124.805,88.763 4.7K.2@125.186,88.763 ; 4.7K.2@125.173,88.776 4.7K.2@125.186,88.763 ; 10.2@127.685,88.763 4.7K.2@125.186,88.763 ; 10.2@128.348,88.75 128.759,88.75 129.109,89.1 129.109,92.622 128.79,92.941 ; 4.7uF.1 135.737,65.532 138.208,65.532 138.658,65.982 330_1.2 ; 4.7K.2@136.222,88.433 136.234,88.433 136.247,88.419 139.135,88.419 139.148,88.407 10.2@139.778,88.407 ; 10.2@136.557,96.933 137.345,96.933 137.795,97.383 4.7K.2@141.224,97.383
pads on no net: ?.5 ULN2003ADWR_1.10
copper on no net: | length 93.7
  Bottom Layer w0.8: 95.63,131.953 95.632,132.461 ; 97.628,131.531 95.631,132.207 ; 97.634,132.864 95.631,132.207 ; 112.076,132.131 95.631,132.207 ; 134.177,132.029 150.622,131.953 ; 148.619,131.296 150.622,131.953 ; 148.625,132.629 150.622,131.953 ; 150.621,131.699 150.623,132.207 ; 152.245,66.263 152.908,64.262 ; 152.364,126.271 153.035,128.27 ; 152.654,64.263 153.162,64.261 ; 152.781,128.271 153.289,128.269 ; 152.95,85.215 152.908,64.262 ; 152.993,107.317 153.035,128.27 ; 153.579,66.261 152.908,64.262 ; 153.698,126.269 153.035,128.27

## Polygon pours and split planes (outlines as drawn)
GND on Bottom Layer "NONET_L-01_P-001" (solid, pour order 1): 137.922,114.554 138.176,114.173 137.541,114.808 144.526,107.823 144.526,78.359 139.319,73.152 139.319,72.136 139.065,71.882 138.938,72.009 130.556,72.009 127.508,68.961 128.143,68.326 143.002,68.326 143.002,70.866 143.129,70.739 146.431,70.866 146.304,97.917 150.495,97.917 150.495,106.553 147.828,106.553 147.474,107.088 147.002,110.299 145.161,112.141 142.294,112.268 142.294,127.708 142.113,127.889 141.859,127.635 137.541,127.635 137.541,115.316 137.541,114.808 137.668,114.681 137.795,114.554
VCC on Bottom Layer "NONET_L-01_P-001" (solid, pour order 0): 95.885,64.516 107.442,64.516 107.442,67.818 104.902,67.818 96.52,76.2 95.885,76.2

## Keep-outs
Keep-Out Layer:
  lines w0.6: 95.377,64.262 151.026,64.262 150.893,128.397 95.377,128.397 95.377,64.262

## Other copper
Bottom Layer:
  rectangle net VCC: 96.16,64.918 97.028,127.127
  rectangle net GND: 137.541,114.808 142.24,127.635
  rectangle net GND: 119.711,126.365 140.335,127.635
  rectangle net GND: 139.319,70.866 146.431,73.152
  rectangle net GND: 130.175,68.326 143.002,71.501
  rectangle net VCC: 107.442,64.918 139.446,66.167
  rectangle net GND: 98.171,109.093 103.759,116.205
  rectangle net VCC: 96.266,106.045 97.79,127.635
  rectangle net GND: 98.171,109.22 100.33,126.111
  rectangle net GND: 98.806,121.412 103.505,126.111
  rectangle net VCC: 96.266,65.151 97.028,126.873
  rectangle net VCC: 96.266,126.492 108.458,127.635
  rectangle net VCC: 103.886,124.333 108.458,127.635
  rectangle net Input: 100.711,116.84 108.458,121.031
  rectangle net GND: 103.251,121.412 111.887,123.571
  text "54.992 (mm)" at 112.322,130.33 h2 r359.74
  text "E10" at 147.185,90.797 h2.5 r270
  text "64.008 (mm)" at 154.75,85.466 h2 r89.89
  text "B2" at 147.185,83.939 h2.5 r270
  text "AYESHA" at 147.312,67.81 h2.5 r270

## Text inside footprints (layer, text, board x,y; h text height)
_1: Top Overlay "Block Connector" at 105.283,119.126 h0.51 r90